# EAGLE board MotorControl (EAGLE 9.6.2)
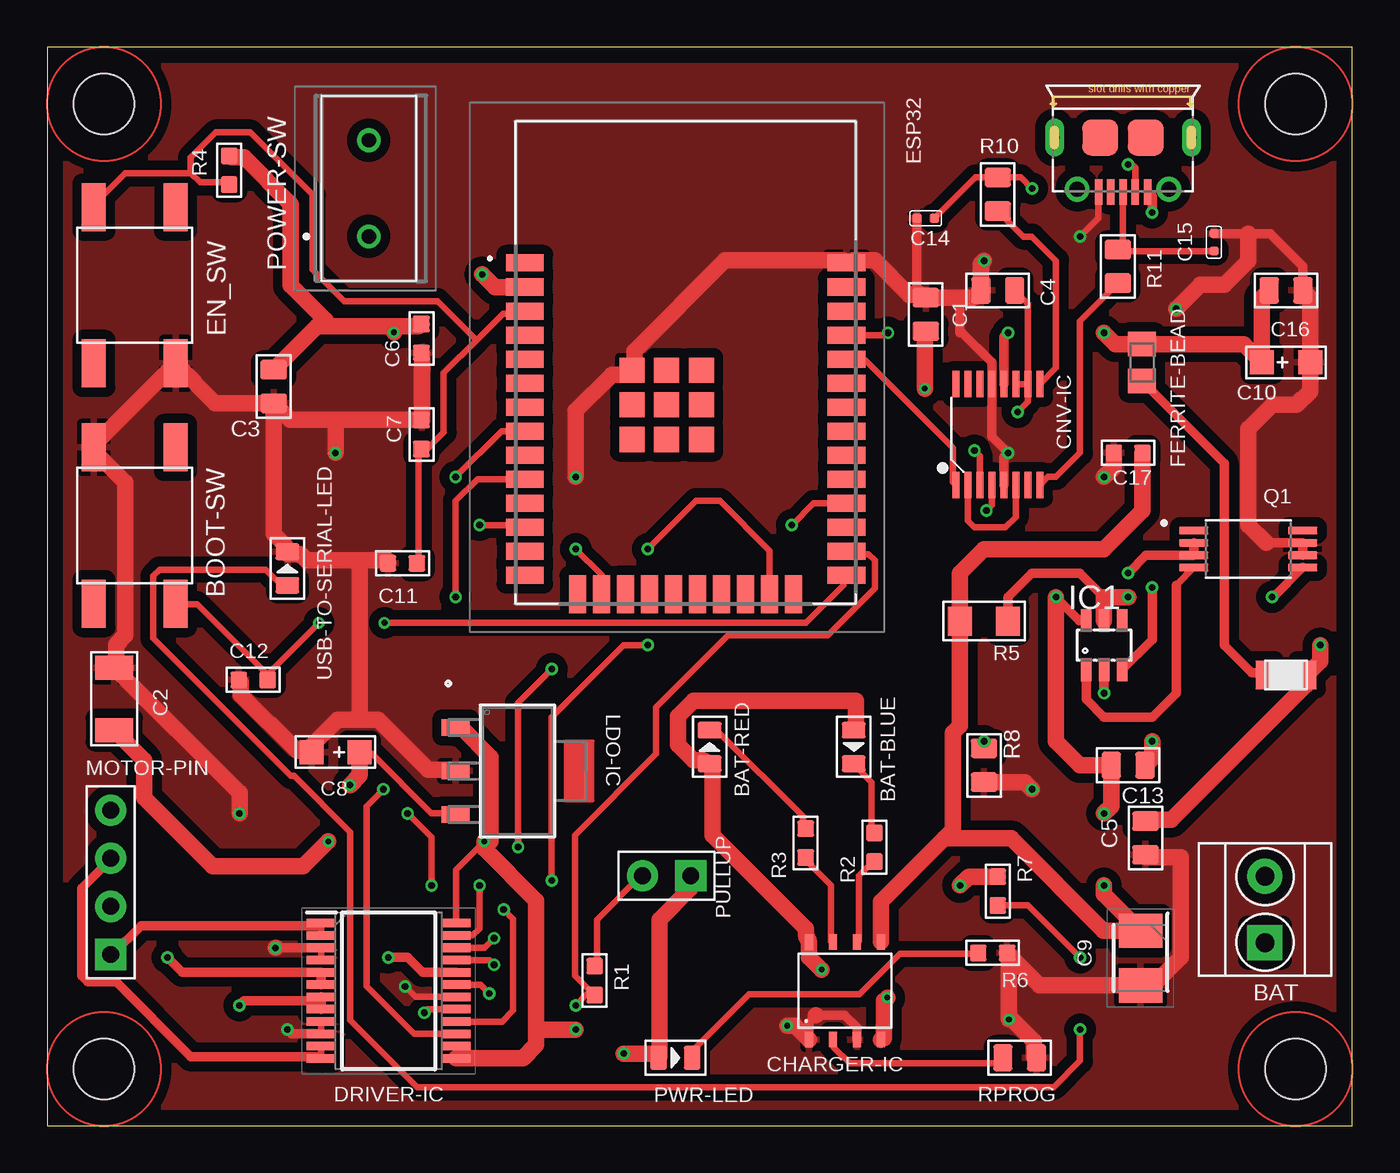
[diagram p0: board, top side]
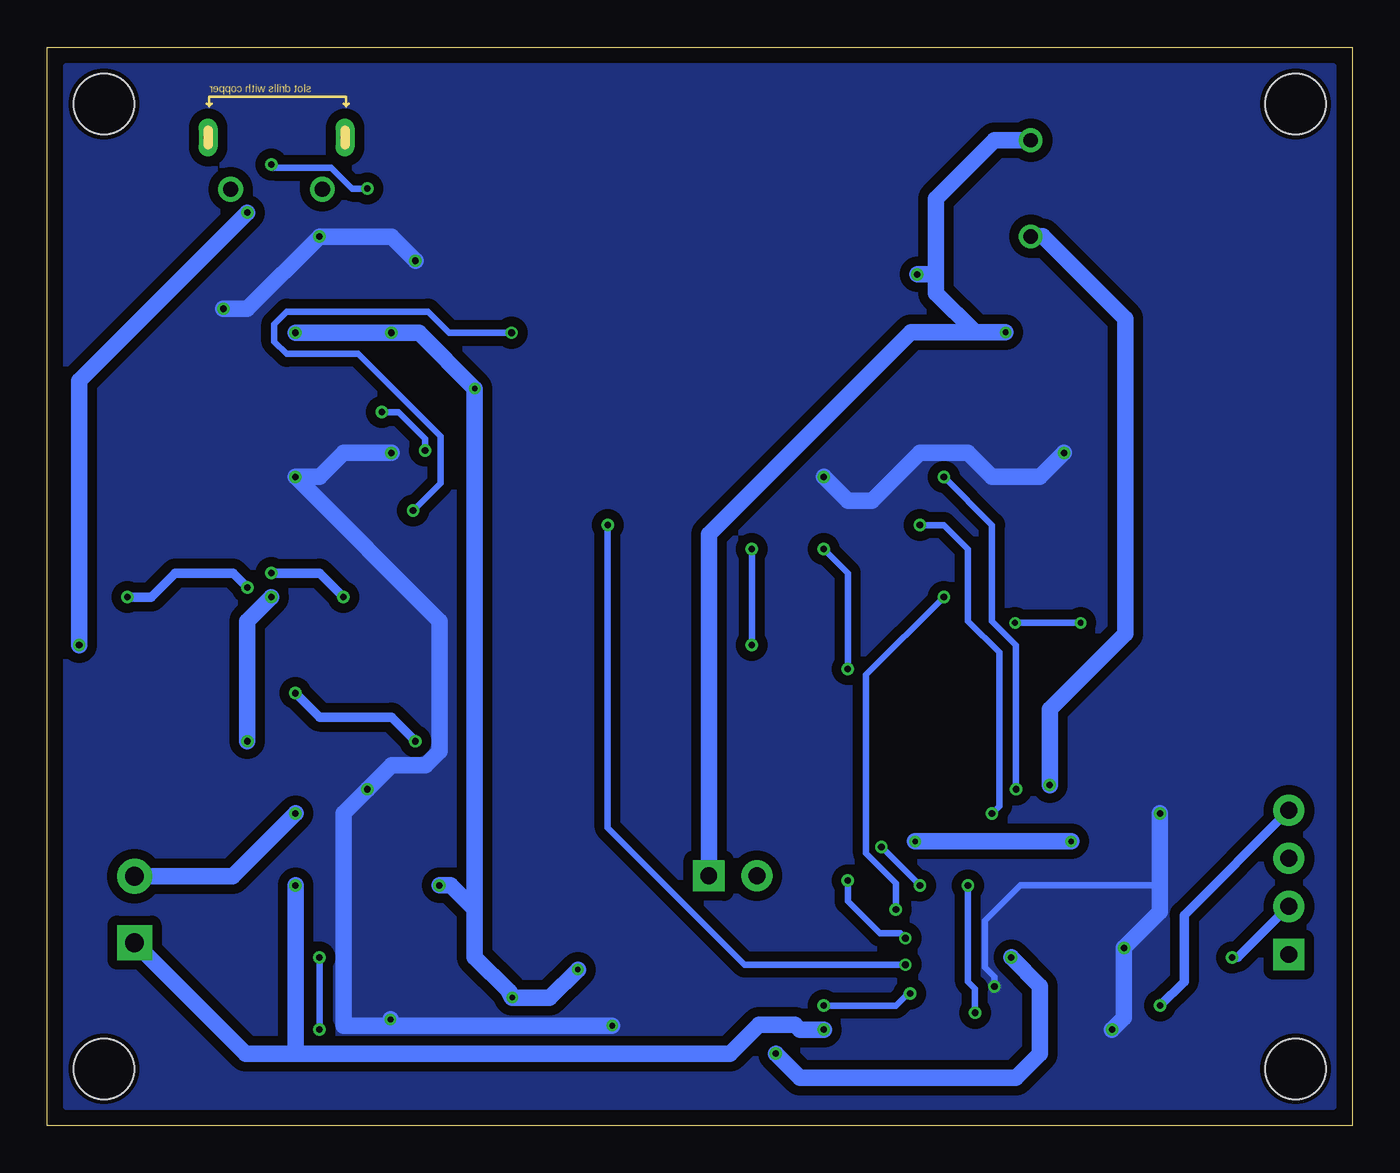
[diagram p1: board, bottom side, seen from below]

Size 69 x 57 mm. Coordinates in mm from the lower left corner, seen from the top.
Outline: 0,0 69,0 69,57 0,57 0,0
Copper layers (1*16): Top 0.035mm / dielectric 1.5mm / Bottom 0.035mm
Design rules "SeeedStudio_2layer_DRU_no_angle_20140221": minimum track width 6mil, minimum drill 12mil, track to track 6mil, track to pad 6mil, pad to pad 6mil, via to via 6mil, smd to smd 0mil, copper to edge 10mil, drill to drill 10mil, minimum pad ring 10mil, minimum via ring 6mil, stop-mask expansion 2mil, vias tented up to drill 100mil, thermal gap 10mil
Net classes: 0 default: width 0.356 mm, clearance 0.305 mm; 1 Power: width 0.864 mm, clearance 0.508 mm; 2 Motor: width 0.508 mm, clearance 0.356 mm
Holes 3.2 mm at 3,3 3,54 66,3 66,54

## Footprints (pad centres in the part's own frame; a part is rotated, then mirrored left to right if it is on the bottom)
H2-3.5-7.0X7.0MM = drill 1 pad 1.85 square: 1 -1.75,0 | drill 1 pad 1.85: 2 1.75,0
LED-0805 = smd 0.889 x 1.27: + -0.889,0; - 0.889,0
SW4-SMD-6.0X6.0X5.0MM = smd 2.54 x 1.27: 1 -4.129,2.159; 2 -4.129,-2.159; 3 4.129,-2.159; 4 4.129,2.159
C0805 = smd 1.397 x 1.016: 1 0,0.889; 2 0,-0.889
C1206 = smd 1.27 x 2.032: 1 -1.651,0; 2 1.651,0
C0603 = smd 0.889 x 0.889: 1 0,0.762; 2 0,-0.762
AVX-A = smd 1.27 x 1.27: + -1.27,0; - 1.27,0
CAPPM3528X210N = smd 1.8 x 2.3: 1 -1.45,0; 2 1.45,0
C0402 = smd 0.5 x 0.5: 1 0,0.463; 2 0,-0.463
SOT23-8 = smd 0.42 x 0.835: 1 -1.905,-2.58; 2 -0.635,-2.58; 3 0.635,-2.58; 4 1.905,-2.58; 5 1.905,2.58; 6 0.635,2.58; 7 -0.635,2.58; 8 -1.905,2.58
SSOP16-0.635-5X4MM = smd 0.381 x 1.397: 1 -2.223,-2.667; 2 -1.587,-2.667; 3 -0.953,-2.667; 4 -0.318,-2.667; 5 0.318,-2.667; 6 0.953,-2.667; 7 1.587,-2.667; 8 2.223,-2.667; 9 2.223,2.667; 10 1.587,2.667; 11 0.953,2.667; 12 0.318,2.667; 13 -0.318,2.667; 14 -0.953,2.667; 15 -1.587,2.667; 16 -2.223,2.667
SOP65P760X160-24N = smd 1.525 x 0.45: 1 -3.562,3.575; 2 -3.562,2.925; 3 -3.562,2.275; 4 -3.562,1.625; 5 -3.562,0.975; 6 -3.562,0.325; 7 -3.562,-0.325; 8 -3.562,-0.975; 9 -3.562,-1.625; 10 -3.562,-2.275; 11 -3.562,-2.925; 12 -3.562,-3.575; 13 3.562,-3.575; 14 3.562,-2.925; 15 3.562,-2.275; 16 3.562,-1.625; 17 3.562,-0.975; 18 3.562,-0.325; 19 3.562,0.325; 20 3.562,0.975; 21 3.562,1.625; 22 3.562,2.275; 23 3.562,2.925; 24 3.562,3.575
ESP32WROOM32E8MB = smd 2 x 0.9: 1 -8.5,5.26; 2 -8.5,3.99; 3 -8.5,2.72; 4 -8.5,1.45; 5 -8.5,0.18; 6 -8.5,-1.09; 7 -8.5,-2.36; 8 -8.5,-3.63; 9 -8.5,-4.9; 10 -8.5,-6.17; 11 -8.5,-7.44; 12 -8.5,-8.71; 13 -8.5,-9.98; 14 -8.5,-11.25; 25 8.5,-11.25; 26 8.5,-9.98; 27 8.5,-8.71; 28 8.5,-7.44; 29 8.5,-6.17; 30 8.5,-4.9; 31 8.5,-3.63; 32 8.5,-2.36; 33 8.5,-1.09; 34 8.5,0.18; 35 8.5,1.45; 36 8.5,2.72; 37 8.5,3.99; 38 8.5,5.26 | smd 0.9 x 2: 15 -5.715,-12.25; 16 -4.445,-12.25; 17 -3.175,-12.25; 18 -1.905,-12.25; 19 -0.635,-12.25; 20 0.635,-12.25; 21 1.905,-12.25; 22 3.175,-12.25; 23 4.445,-12.25; 24 5.715,-12.25 | smd 1.33 x 1.33: 39 -2.835,-0.405; 40 -1,-0.405; 41 0.835,-0.405; 42 -2.835,-2.24; 43 -1,-2.24; 44 0.835,-2.24; 45 -2.835,-4.075; 46 -1,-4.075; 47 0.835,-4.075
FB_LI0805H151R-10 = smd 1.285 x 1.47: 1 -0.973,0; 2 0.973,0
SMD0805R035SF = smd 1 x 1.5: 1 -1.1,0; 2 1.1,0
SOT23-6 = smd 0.55 x 1.2: 1 -0.95,-1.3; 2 0,-1.3; 3 0.95,-1.3; 4 0.95,1.3; 5 0,1.3; 6 -0.95,1.3
SOT-223-3_VAR-AA = smd 0.889 x 1.473: 1 -2.3,-3.264; 2 0,-3.264; 3 2.3,-3.264
H4-2.54 = drill 0.889 pad 1.651 square: 1 0,3.81 | drill 0.889 pad 1.651: 2 0,1.27; 3 0,-1.27; 4 0,-3.81
A11JP = drill 0.75 pad 1.2: 1 0,0; 3 0,-5.08
H2-2.54 = drill 0.889 pad 1.651 square: 1 0,1.27 | drill 0.889 pad 1.651: 2 0,-1.27
SOP65P640X120-8N = smd 1.56 x 0.4: 1 -2.88,0.975; 2 -2.88,0.325; 3 -2.88,-0.325; 4 -2.88,-0.975; 5 2.88,-0.975; 6 2.88,-0.325; 7 2.88,0.325; 8 2.88,0.975
R0603 = smd 0.889 x 0.889: 1 0,0.762; 2 0,-0.762
R1206 = smd 1.27 x 1.524: 1 -1.27,0; 2 1.27,0
R0805 = smd 1.397 x 1.016: 1 0,0.889; 2 0,-0.889
MICRO-USB5+6P-SMD-0.65-AB = smd 0.4 x 1.35: 1 -1.3,2.875; 2 -0.65,2.875; 3 0,2.875; 4 0.65,2.875; 5 1.3,2.875 | smd 1.9 x 1.9: P1 -1.2,0; P2 1.2,0 | drill 0.508 pad 1.016 long: P3 -3.625,0; P4 3.625,0 | drill 0.8: P5 -2.425,2.73; P6 2.425,2.73

## Placement (x,y rotation side)
BAT  GREEN-2P-3.5  [H2-3.5-7.0X7.0MM]  64.39,11.43 90 top
BAT-BLUE  CLEAR-BLUE-0805  [LED-0805]  42.64,20.02 270 top
BAT-RED  RED-0805  [LED-0805]  35.02,20.02 90 top
BOOT-SW  [SW4-SMD-6.0X6.0X5.0MM]  4.62,31.72 90 top
C1  100nf  [C0805]  46.45,42.88 0 top
C2  10uf  [C1206]  3.54,22.56 270 top
C3  22uf  [C0805]  11.97,39.07 180 top
C4  100nf  [C0805]  50.26,44.15 90 top
C5  10nf  [C0805]  58.07,15.21 0 top
C6  100nF/50V(10%)  [C0603]  19.78,41.61 180 top
C7  100nF/50V(10%)  [C0603]  19.78,36.53 0 top
C8  10uf  [AVX-A]  15.24,19.75 180 top
C9  6.8uF  [CAPPM3528X210N]  57.8,8.86 270 top
C10  4.7uf  [AVX-A]  65.5,40.34 0 top
C11  100nF/50V(10%)  [C0603]  18.78,29.72 90 top
C12  100nF/50V(10%)  [C0603]  10.89,23.56 90 top
C13  100nf  [C0805]  57.15,19.05 270 top
C14  47PF  [C0402]  46.45,47.96 270 top
C15  47PF  [C0402]  61.69,46.69 180 top
C16  100nf  [C0805]  65.5,44.15 270 top
C17  10UF 6.3V  [C0603]  57.15,35.56 270 top
CHARGER-IC  TP4056  [SOT23-8]  42.18,7.13 0 top
CNV-IC  INTERFACE-FT230XS-R(SSOP16)  [SSOP16-0.635-5X4MM]  50.26,36.53 0 top
DRIVER-IC  TB6612FNG  [SOP65P760X160-24N]  18.05,7.13 0 top
EN_SW  [SW4-SMD-6.0X6.0X5.0MM]  4.62,44.42 270 top
ESP32  ESP32-WROOM-32E8M  [ESP32WROOM32E8MB]  33.75,40.34 0 top
FERRITE-BEAD  LI0805H151R-10  [FB_LI0805H151R-10]  57.88,40.34 270 top
HUSE  SMD0805R035SF  [SMD0805R035SF]  65.5,23.83 0 top
IC1  DW01A  [SOT23-6]  55.88,25.4 0 top
LDO-IC  SPX3940AM3-L-3-3/TR  [SOT-223-3_VAR-AA]  24.86,18.75 270 top
MOTOR-PIN  4p-2.54  [H4-2.54]  3.35,12.86 180 top
POWER-SW  A11JP  [A11JP]  17,47 180 top
PULLUP  [H2-2.54]  32.75,13.21 270 top
PWR-LED  YELLOW-0805  [LED-0805]  33.21,3.59 0 top
Q1  FS8205A  [SOP65P640X120-8N]  63.5,30.48 0 top
R1  10K  [R0603]  28.94,7.67 180 top
R2  1K  [R0603]  43.73,14.72 0 top
R3  1K  [R0603]  40.1,14.94 0 top
R4  10K  [R0603]  9.62,50.5 180 top
R5  100R  [R1206]  49.53,26.67 180 top
R6  300R  [R0603]  49.99,9.13 90 top
R7  1K  [R0603]  50.26,12.4 180 top
R8  1K  [R0805]  49.53,19.05 0 top
R10  27R  [R0805]  50.26,49.23 0 top
R11  27R  [R0805]  56.61,45.42 0 top
RPROG  1.2K  [R0805]  51.42,3.59 270 top
USB1  ZX62-B-5PA  [MICRO-USB5+6P-SMD-0.65-AB]  56.88,52.23 180 top
USB-TO-SERIAL-LED  GREEN-0805  [LED-0805]  12.7,29.45 90 top

## Library data of the parts
BAT = OPL_Connector; MPN: GS012S-3.5-02P-11
BAT-BLUE = OPL_Optoelectronics; MPN: EL-17-215/BHC-AN1P2/3T
BAT-RED = OPL_Optoelectronics; MPN: 17-215SURC/S530-A2/TR8
BOOT-SW EN_SW = OPL_Switch; MPN: DTSM-62K-S-V-T/R(SN431)
C1 C4 C13 C16 = OPL_Capacitor; MPN: CC0805KRX7R9BB104
C2 = OPL_Capacitor; MPN: CC1206KKX5R8BB106
C3 = OPL_Capacitor; MPN: CC0805MKX5R5BB226
C5 = OPL_Capacitor; MPN: CC0805JRX7R9BB103
C6 C7 C11 C12 = OPL_Capacitor; MPN: CC0603KRX7R9BB104
C8 = OPL_Capacitor; MPN: TAJA106K016RNJ
C9 = TCJB685M025R0150; MPN: TCJB685M025R0150
C10 = OPL_Capacitor; MPN: TAJA475*016#NJ
C14 C15 = OPL_Capacitor; MPN: CC0402JRNPO9BN470
C17 = OPL_Capacitor; MPN: CC0603MRX5R5BB106
CHARGER-IC = TP4056; MPN: TP4056
CNV-IC = INTERFACE-FT230XS-R_SSOP16_; AVAILABILITY: In Stock; DESCRIPTION: USB Bridge, USB to UART USB 2.0 UART Interface 16-SSOP; MF: FTDI,; MP: FT230XS-R; PACKAGE: SSOP-16 FTDI; PRICE: None; PURCHASE-URL: https://pricing.snapeda.com/search/part/FT230XS-R/?ref=eda
DRIVER-IC = TB6612FNG; DESCRIPTION: Brush motor driver IC; HEIGHT: 1.6mm; MANUFACTURER_NAME: Toshiba; MANUFACTURER_PART_NUMBER: TB6612FNG
ESP32 = ESP32-WROOM-32; DESCRIPTION: WiFi Modules (802.11) Mod 8 MB SPI flash PCB antenna; HEIGHT: 3.2mm; MANUFACTURER_NAME: Espressif Systems; MANUFACTURER_PART_NUMBER: ESP32-WROOM-32E (8MB); MOUSER_PART_NUMBER: 356-ESP32WRM32E164PH; MOUSER_PRICE-STOCK: https://www.mouser.co.uk/ProductDetail/Espressif-Systems/ESP32-WROOM-32E-8MB?qs=GBLSl2AkirsjshqvD9slKA%3D%3D
FERRITE-BEAD = LI0805H151R-10; AVAILABILITY: In Stock; DESCRIPTION: 150 Ohms @ 100MHz 1 Power, Signal Line Ferrite Bead 0805 (2012 Metric) 800mA 150mOhm; MF: Laird-Signal Integrity; MP: LI0805H151R-10; PACKAGE: 0805 Laird; PRICE: None; PURCHASE-URL: https://pricing.snapeda.com/search/part/LI0805H151R-10/?ref=eda
HUSE = SMD0805R035SF; MPN: SMD0805R035SF
IC1 = DW01A; AVAILABILITY: No availability data; DESCRIPTION: One Cell Lithium-ion/Polymer Battery Protection IC; MF: Fortune Semiconductor; MP: DW01A; PACKAGE: SOT-23-6 Fortune Semiconductor; PRICE: None
LDO-IC = SPX3940AM3-L-3-3:TR; BUILT_BY: EMA_Jessica; COPYRIGHT: Copyright (C) 2018 Accelerated Designs. All rights reserved; MANUFACTURER_PART_NUMBER: SPX3940AM3-L-3-3/TR; SOURCELIBRARY: Exar_2019-09-16; VENDOR: Exar
MOTOR-PIN = OPL_Connector; MPN: F185-1104A1BSYA1
POWER-SW = A11JP; ARROW_PART_NUMBER: A11JP; ARROW_PRICE-STOCK: https://www.arrow.com/en/products/a11jp/nkk-switches; DESCRIPTION: NKK SWITCHES - A11JP - SWITCH, TOGGLE, SPST, 0.1A, 28VAC; HEIGHT: 19.4mm; MANUFACTURER_NAME: NKK Switches; MANUFACTURER_PART_NUMBER: A11JP; MOUSER_PART_NUMBER: 633-A11JP; MOUSER_PRICE-STOCK: https://www.mouser.co.uk/ProductDetail/NKK-Switches/A11JP?qs=KqcCwYXy5KGYGAOWVYZnow%3D%3D
PULLUP = OPL_Connector
PWR-LED = OPL_Optoelectronics; MPN: 17-215UYC/S530-A3/TR8
Q1 = FS8205A; AVAILABILITY: No availability data; MF: Fortune Semiconductor; MP: FS8205A; PACKAGE: Package; PRICE: None
R1 R4 = OPL_Resistor; MPN: RC0603FR-0710KL
R2 R3 R7 = OPL_Resistor; MPN: RC0603FR-071KL
R5 = OPL_Resistor; MPN: RC1206JR-07100RL
R6 = OPL_Resistor; MPN: RC0603FR-071K5L
R8 R10 R11 RPROG = OPL_Resistor; MPN: RC0805JR-071KL
USB1 = OPL_Connector; MPN: ZX62-B-5PA
USB-TO-SERIAL-LED = OPL_Optoelectronics; MPN: 17-215SYGC/S530-E2/TR8

## Nets
+3V3 [Power]: C3.2 C6.2 DRIVER-IC.20 ESP32.2 POWER-SW.3 PULLUP.1 PWR-LED.+ R4.2
AIN1: DRIVER-IC.21 ESP32.28
AIN2: DRIVER-IC.22 ESP32.23
AO1 [Motor]: DRIVER-IC.1 DRIVER-IC.2 MOTOR-PIN.1
AO2 [Motor]: DRIVER-IC.5 DRIVER-IC.6 MOTOR-PIN.2
B+ [Power]: BAT.1 C2.2 C9.1 C17.1 CHARGER-IC.5 DRIVER-IC.13 DRIVER-IC.14 DRIVER-IC.24 LDO-IC.1 R5.2
B- [Power]: BAT.2 C13.2 IC1.6 Q1.2 Q1.3
BIN1: DRIVER-IC.17 ESP32.12
BIN2: DRIVER-IC.16 ESP32.10
BO1 [Motor]: DRIVER-IC.11 DRIVER-IC.12 MOTOR-PIN.3
BO2 [Motor]: DRIVER-IC.7 DRIVER-IC.8 MOTOR-PIN.4
GND [Power]: BOOT-SW.4 C1.1 C2.1 C3.1 C4.1 C5.2 C6.1 C7.1 C8.- C9.2 C10.- C11.1 C12.1 C14.2 C15.2 C16.1 C17.2 CHARGER-IC.1 CHARGER-IC.3 CNV-IC.5 CNV-IC.13 DRIVER-IC.3 DRIVER-IC.4 DRIVER-IC.9 DRIVER-IC.10 DRIVER-IC.18 EN_SW.4 ESP32.38 ESP32.39 LDO-IC.2 Q1.6 Q1.7 R6.2 R8.2 RPROG.1 USB1.5 USB-TO-SERIAL-LED.-
N$1: IC1.3 Q1.5
N$2: BAT-RED.- R3.1
N$3: R7.1 USB-TO-SERIAL-LED.+
N$4: FERRITE-BEAD.2 HUSE.1
N$5: C4.2 CNV-IC.3 CNV-IC.10 CNV-IC.11
N$6: CNV-IC.2 CNV-IC.6
N$7: CNV-IC.9 R10.2
N$8: CNV-IC.8 R11.2
N$9: C14.1 R10.1 USB1.2
N$10: IC1.1 Q1.4
N$11: CHARGER-IC.7 R3.2
N$12: CHARGER-IC.6 R2.2
N$13: BAT-BLUE.- R2.1
N$14: PWR-LED.- R6.1
N$15: C15.1 R11.1 USB1.3
N$16: CHARGER-IC.2 RPROG.2
N$18: C13.1 IC1.5 R5.1
N$19: IC1.2 R8.1
N$25: PULLUP.2 R1.2
N$29: C7.2 C11.2 EN_SW.2 ESP32.3 R4.1
N$30: BOOT-SW.2 C12.2 ESP32.25
POWER_SW: C8.+ LDO-IC.3 POWER-SW.1
PWMA: DRIVER-IC.23 ESP32.16
PWMB: DRIVER-IC.15 ESP32.8
RXD: CNV-IC.4 ESP32.35
STBY: DRIVER-IC.19 ESP32.26 R1.1
TXD: CNV-IC.1 ESP32.34
VBUS [Power]: C5.1 HUSE.2 USB1.1
VIN+ [Power]: BAT-BLUE.+ BAT-RED.+ C1.2 C10.+ C16.2 CHARGER-IC.4 CHARGER-IC.8 CNV-IC.12 FERRITE-BEAD.1 R7.2

## Tracks (layer width: path | path; a pad name or v marks a point on that pad's centre or on a via)
+3V3  (via drill 0.3, 0.35)
  Top 0.356: 32.1,3.81 PWR-LED.+
  Top 0.508: DRIVER-IC.20 19.84,8.11 19.05,8.89 v18.03,8.89
  Top 0.864: PWR-LED.+ 32.36,3.63 32.36,10.9 34.01,12.55 PULLUP.1 | 14.86,42.27 18.33,42.27 | 18.33,42.27 19.65,42.27 C6.2 | R4.2 9.74,51.18 10.4,51.18 12.88,48.7 12.88,44.41 14.69,42.6 14.86,42.27 | v18.33,41.94 18.33,42.27 | ESP32.2 23.67,44.33 v23,45 | v30.48,3.81 32.1,3.81 | C3.2 14.28,42.27 14.86,42.27
  Bottom 0.864: PULLUP.1 34.01,13.37 34.01,31.25 23.33,41.94 v18.33,41.94 19.93,41.94 22,44 22,45 | 22,45 22,49 18.92,52.08 POWER-SW.3 | v23,45 22,45 | v30.48,3.81 29.21,2.54 17.78,2.54 16.51,3.81 16.51,7.37 v18.03,8.89
AIN1  (via drill 0.35)
  Top 0.356: ESP32.28 40.52,32.9 v39.37,31.75 | DRIVER-IC.21 23.38,8.76 v23.62,8.51
  Bottom 0.356: v39.37,31.75 39.37,15.75 32.13,8.51 v23.62,8.51
AIN2  (via drill 0.35)
  Top 0.356: v26.67,12.95 26.67,21.59 30.48,25.4 v31.75,25.4 | v31.75,30.48 34.29,33.02 35.56,33.02 38.2,30.39 ESP32.23 | DRIVER-IC.22 23.12,9.4 v23.62,9.91
  Bottom 0.356: v31.75,25.4 v31.75,30.48 | v23.62,9.91 23.88,10.16 24.97,10.16 26.67,11.86 v26.67,12.95
AO1
  Top 0.356: DRIVER-IC.2 DRIVER-IC.1
  Top 0.508: DRIVER-IC.1 14.36,10.57 4.95,10.57 3.47,9.08 MOTOR-PIN.1
AO2  (via drill 0.35)
  Top 0.508: DRIVER-IC.6 DRIVER-IC.5 7.13,8.11 v6.35,8.89
  Bottom 0.508: v6.35,8.89 6.05,8.89 MOTOR-PIN.2
B+  (via drill 0.3, 0.35)
  Top 0.356: DRIVER-IC.24 21.61,13.52 v23.11,15.02 | DRIVER-IC.14 DRIVER-IC.13
  Top 0.864: 47.43,15.19 44.08,11.84 44.09,11.83 CHARGER-IC.5 | 47.43,15.19 50.97,15.19 55.84,10.31 C9.1 55.88,12.23 v55.88,12.7 | C2.2 3.63,20.8 5.12,19.32 5.12,17.34 8.75,13.7 13.54,13.7 v14.86,15.02 | LDO-IC.1 21.63,20.97 21.96,20.97 23.44,19.48 23.44,15.02 v23.11,15.02 23.11,14.64 25.86,11.9 25.86,5.08 | v27.94,5.08 25.86,5.08 | C17.1 57.91,32.51 55.88,30.48 49.53,30.48 48.26,29.21 R5.2 48.26,21.13 47.89,20.76 47.89,15.65 47.43,15.19 | 25.86,5.08 25.86,4.27 25.14,3.56 DRIVER-IC.13
  Bottom 0.864: v23.11,15.02 v14.86,15.02 | v27.94,5.08 29.21,5.08 29.46,5.33 31.37,5.33 32.91,3.8 55.88,3.8 | v55.88,12.7 55.88,3.8 | BAT.1 58.51,3.8 55.88,3.8
B-  (via drill 0.35)
  Top 0.508: Q1.2 Q1.3 58.09,30.16 v57.15,29.21 | IC1.6 54.58,26.7 v53.34,27.94
  Top 0.864: v53.34,27.94 53.34,20.32 54.61,19.05 C13.2 56.26,16.89 v55.88,16.51
  Bottom 0.508: v53.34,27.94 54.61,29.21 v57.15,29.21
  Bottom 0.864: BAT.2 59.21,13.18 v55.88,16.51
BIN1  (via drill 0.35)
  Top 0.356: v20.32,12.7 20.32,15.24 v19.05,16.51 | ESP32.12 25.13,31.75 v22.86,31.75 | DRIVER-IC.17 20.12,6.16 v19.94,5.97
  Bottom 0.356: v19.05,16.51 18.67,16.89 18.67,25.02 20.32,26.67 20.32,30.48 21.59,31.75 v22.86,31.75 | v19.94,5.97 19.94,7.24 20.32,7.62 v20.32,12.7
BIN2  (via drill 0.35)
  Top 0.356: DRIVER-IC.16 24.05,5.5 24.64,6.1 24.64,10.92 v24.13,11.43 | ESP32.10 22.74,34.17 21.59,33.02 v21.59,27.94
  Bottom 0.356: v24.13,11.43 24.13,12.82 25.7,14.4 25.7,23.83 v21.59,27.94
BO1
  Top 0.356: DRIVER-IC.11 DRIVER-IC.12
  Top 0.508: DRIVER-IC.12 14.36,3.63 7.59,3.63 3.63,7.59 2.15,7.59 1.82,7.92 1.82,12.55 3.3,14.03 MOTOR-PIN.3
BO2  (via drill 0.35)
  Top 0.508: DRIVER-IC.7 14.49,6.59 | 14.49,6.59 DRIVER-IC.8 | v10.16,6.35 10.4,6.59 14.49,6.59
  Bottom 0.508: MOTOR-PIN.4 8.89,11.13 8.89,7.62 v10.16,6.35
GND  (via drill 0.3, 0.35)
  Top 0.356: USB1.5 55.58,47.96 v54.61,46.99 | DRIVER-IC.3 DRIVER-IC.4 | DRIVER-IC.9 DRIVER-IC.10 | DRIVER-IC.18 19.48,6.8 v18.92,7.37
  Top 0.508: 64.44,30.8 Q1.7 Q1.6 | 48.26,43.77 48.26,41.91 48.37,41.91 49.94,40.34 CNV-IC.13 49.94,36.42 v50.8,35.56 50.58,35.34 CNV-IC.5 | C16.1 66.39,45.42 64.66,47.15 63.5,47.15 C15.2 | DRIVER-IC.3 12.07,9.4 | DRIVER-IC.10 12.93,4.86 v12.7,5.08 | CHARGER-IC.1 40.27,5.46 40.64,5.83 | CHARGER-IC.3 42.81,5.19 42.16,5.84 40.65,5.84 | C14.2 45.99,44.32 46.56,43.75
  Top 0.864: C12.1 10.24,23.44 10.24,22.78 13.21,19.81 13.87,19.81 C8.- 14.03,20.14 15.35,21.46 16.51,21.46 | 16.51,21.46 17.5,21.46 20.14,18.82 21.46,18.82 LDO-IC.2 | C6.1 19.81,40.78 19.81,37.31 C7.1 19.48,37.31 15.24,37.31 | 16.51,29.88 13.7,29.88 13.37,30.21 12.71,30.21 USB-TO-SERIAL-LED.- 12.55,30.71 11.97,31.29 C3.1 | 16.51,29.88 18,29.88 C11.1 | 16.51,29.88 16.51,21.46 | 50.85,5.78 50.85,9.08 R6.2 52.45,7.43 57.95,7.43 | 50.85,5.78 52.17,4.46 52.17,3.63 RPROG.1 | C5.2 58.12,14.2 59.93,14.2 59.93,8.91 58.45,7.43 57.95,7.43 | 57.95,7.43 C9.2 | v50.85,5.61 50.85,5.78 | 46.56,43.75 C1.1 | C1.1 46.06,43.92 45.57,43.92 43.75,45.73 42.6,45.73 ESP32.38 42.1,45.73 35.83,45.73 31.04,40.95 31.04,39.95 ESP32.39 30.68,39.7 29.86,39.7 27.94,37.78 v27.94,34.29 | R8.2 51.69,18.16 v52.07,17.78 | 64.44,30.8 63.5,31.75 63.5,36.83 64.77,38.1 66.04,38.1 66.77,38.83 C10.- 66.77,43.77 C16.1 | C1.1 48.26,43.77 48.99,43.77 C4.1 49.37,45.56 v49.53,45.72 | v59.69,43.18 60.96,44.45 62.23,44.45 63.5,45.72 63.5,47.15 | v55.88,34.29 56.39,34.8 C17.2 | 15.24,37.31 v15.24,35.56 | v10.16,16.51 10.16,17.59 C2.1 3.63,24.11 3.63,25.43 4.13,25.92 4.13,34.01 2.64,35.5 BOOT-SW.4 2.48,35.99 EN_SW.4 8.89,38.18 C3.1 | 12.07,9.4 v12.06,9.4 | 40.65,5.84 40.64,5.83 | CHARGER-IC.1 39.54,5.28 v39.13,5.28 | C3.1 12.84,37.31 15.24,37.31
  Bottom 0.356: 10.16,12.7 17.55,12.7 19.43,10.82 19.43,8.38 18.92,7.87 v18.92,7.37
  Bottom 0.864: 50.85,5.28 53.34,5.28 53.34,16.51 v52.07,17.78 50.8,19.05 49.01,19.05 48.26,19.8 48.26,26.67 v55.88,34.29 54.61,34.29 53.34,35.56 v50.8,35.56 | 50.85,5.28 v39.13,5.28 | v50.85,5.61 50.85,5.28 | v49.53,45.72 50.8,46.99 v54.61,46.99 58.42,43.18 v59.69,43.18 | v15.24,35.56 16.51,34.29 19.05,34.29 20.32,35.56 22.86,35.56 25.4,33.02 26.67,33.02 v27.94,34.29 | v10.16,16.51 10.16,12.7 10.16,11.3 v12.06,9.4 12.06,5.71 v12.7,5.08
  pour Bottom: 1,56 1,1 68,1 68,56
  pour Top: 1,56 1,1 68,1 68,56
N$1  (via drill 0.35)
  Top 0.508: IC1.3 58.42,25.69 v58.42,28.45 | Q1.5 64.81,27.94 v64.77,27.94
  Bottom 0.508: v58.42,28.45 59.18,29.21 62.23,29.21 63.5,27.94 v64.77,27.94
N$2
  Top 0.356: R3.1 39.95,15.85 39.95,16.34 35.5,20.8 35.17,20.8 BAT-RED.-
N$3  (via drill 0.35)
  Top 0.356: USB-TO-SERIAL-LED.+ 12.55,28.4 11.56,29.39 5.94,29.39 5.61,29.06 5.61,25.76 12.88,18.49 13.04,18.49 16.02,15.52 16.02,5.58 19.56,2.03 53.21,2.03 54.61,3.43 v54.61,5.08 | R7.1 51.86,11.64 v54.61,8.89
  Bottom 0.356: v54.61,8.89 v54.61,5.08
N$4
  Top 0.356: 64.39,23.94 HUSE.1
  Top 0.508: FERRITE-BEAD.2 62.23,35.02 62.23,25.4 63.69,23.94 64.39,23.94
N$5  (via drill 0.35)
  Top 0.356: CNV-IC.10 51.85,43.45 C4.2 | CNV-IC.10 CNV-IC.11 | CNV-IC.3 49.31,35.4 v49.02,35.69 | CNV-IC.10 51.85,38.26 v51.31,37.72
  Bottom 0.356: v49.02,35.69 49.02,36.32 50.42,37.72 v51.31,37.72
N$6
  Top 0.356: CNV-IC.2 48.67,31.97 49.02,31.62 50.67,31.62 51.21,32.16 CNV-IC.6
N$7
  Top 0.356: R10.2 51.61,46.99 52.07,46.99 53.34,45.72 53.34,40.05 CNV-IC.9
N$8
  Top 0.356: R11.2 54.61,42.53 54.61,35.56 53.34,34.29 52.91,34.29 CNV-IC.8
N$9  (via drill 0.35)
  Top 0.356: USB1.2 57.53,50.62 57.35,50.8 v57.15,50.8 | C14.1 49.07,50.12 R10.1 51.48,50.12 v52.07,49.53
  Bottom 0.356: v52.07,49.53 52.88,49.53 53.98,50.64 56.99,50.64 v57.15,50.8
N$10
  Top 0.381: Q1.4 59.69,28.57
  Top 0.508: IC1.1 54.93,22.54 55.88,21.59 58.42,21.59 59.69,22.86 59.69,28.57
N$11
  Top 0.356: CHARGER-IC.7 41.44,9.74 41.44,12.71 40.12,14.03 R3.2
N$12
  Top 0.356: CHARGER-IC.6 42.93,9.74 42.93,13.21 43.59,13.87 R2.2
N$13
  Top 0.356: R2.1 43.59,15.52 43.59,18.16 42.76,18.99 BAT-BLUE.-
N$14
  Top 0.356: PWR-LED.- 34.1,3.94 37.11,6.95 42.94,6.95 45.07,9.08 49.2,9.08 R6.1
N$15
  Top 0.356: USB1.3 56.88,46.58 R11.1 | C15.1 56.69,46.23
  Top 0.864: 56.69,46.23 R11.1
N$16
  Top 0.356: CHARGER-IC.2 41.6,4.46 41.6,4.13 42.43,3.3 50.35,3.3 50.52,3.47 RPROG.2
N$18  (via drill 0.35)
  Top 0.508: R5.1 50.8,27.94 52.07,29.21 54.61,29.21 55.88,27.94
  Top 0.864: IC1.5 55.88,27.94 v57.15,27.94 | C13.1 58.42,19.43 v58.42,20.32
  Bottom 0.864: v57.15,27.94 58.42,26.67 v58.42,20.32
N$19  (via drill 0.35)
  Top 0.508: R8.1 v49.53,20.32 | IC1.2 v55.88,22.86
  Bottom 0.508: v55.88,22.86 54.61,21.59 50.8,21.59 v49.53,20.32
N$25
  Top 0.356: R1.2 29.06,8.59 29.06,10.9 31.37,13.21 PULLUP.2
N$29
  Top 0.356: 7.59,50.35 8.09,49.86 9.58,49.86 R4.1 | 7.59,50.35 4.13,50.35 2.48,48.7 EN_SW.2 | C11.2 19.65,29.88 19.65,35.66 C7.2 19.81,35.5 20.97,36.65 20.97,39.79 22.7,41.52 | 22.7,41.52 24.11,42.93 25.09,42.93 ESP32.3 | 7.59,50.35 7.59,51.18 8.91,52.5 10.73,52.5 14.03,49.2 14.03,45.24 15.68,43.59 20.64,43.59 22.7,41.52
N$30  (via drill 0.3)
  Top 0.356: BOOT-SW.2 6.93,27.57 7.92,27.57 11.56,23.94 11.56,23.61 C12.2 11.72,23.94 v14.36,26.58 | v17.83,26.58 40.12,26.58 42.1,28.56 42.1,29.06 ESP32.25
  Bottom 0.356: v14.36,26.58 v17.83,26.58
POWER_SW  (via drill 0.35)
  Top 0.356: C8.+ 16.51,19.65 17.17,19.65 20.31,16.51 21.46,16.51 LDO-IC.3
  Top 0.864: C8.+ 16.51,18.51 v16,18
  Bottom 0.864: v16,18 16,22 12,26 12,42.64 16.36,47 POWER-SW.1
PWMA  (via drill 0.35)
  Top 0.356: v24.89,14.73 24.89,22.35 v26.67,24.13 | v27.94,30.48 29.3,29.11 ESP32.16 | DRIVER-IC.23 22.5,10.05 22.86,10.41 v22.86,12.7
  Bottom 0.356: v26.67,24.13 26.67,29.21 v27.94,30.48 | v22.86,12.7 v24.89,14.73
PWMB  (via drill 0.35)
  Top 0.356: DRIVER-IC.15 19.4,4.86 16.89,7.37 16.89,16.89 v17.78,17.78 | v21.59,34.29 24.01,36.71 ESP32.8
  Bottom 0.356: v17.78,17.78 17.78,25.4 19.05,26.67 19.05,31.75 v21.59,34.29
RXD  (via drill 0.35)
  Top 0.356: CNV-IC.4 49.94,32.8 v49.66,32.51 | v44.45,41.91 44.33,41.79 ESP32.35
  Bottom 0.356: v49.66,32.51 48.21,33.96 48.21,36.45 52.56,40.79 56.34,40.79 57,41.45 57,42.37 56.34,43.03 48.88,43.03 47.76,41.91 v44.45,41.91
STBY  (via drill 0.35)
  Top 0.356: ESP32.26 42.27,30.21 43.42,30.21 43.75,29.88 43.75,28.4 41.27,25.92 35.99,25.92 32.19,22.12 32.19,19.65 27.9,15.35 27.9,7.92 28.89,6.93 R1.1 28.5,6.91 v27.94,6.35 | DRIVER-IC.19 22.9,7.46 v23.37,6.99
  Bottom 0.356: 23.5,6.99 24.13,6.35 v27.94,6.35
  Bottom 0.508: v23.37,6.99 23.5,6.99
TXD
  Top 0.356: CNV-IC.1 47.88,34.01 47.88,35.83 43.26,40.45 42.27,40.45 ESP32.34
VBUS  (via drill 0.35)
  Top 0.508: USB1.1 58.42,49.12 v58.42,48.26
  Top 0.864: C5.1 58.12,16.18 59.44,16.18 66.53,23.28 66.53,23.77 HUSE.2 67.31,24.54 v67.31,25.4
  Bottom 0.864: v58.42,48.26 67.31,39.37 v67.31,25.4
VIN+  (via drill 0.3, 0.35)
  Top 0.508: CNV-IC.12 50.58,41.69 v50.8,41.91
  Top 0.864: BAT-BLUE.+ 42.76,20.97 42.76,22.45 34.18,22.45 33.35,21.63 33.35,20.14 34.18,19.32 34.67,19.32 BAT-RED.+ 35.17,18.99 35.17,15.35 40.12,10.4 40.12,10.07 CHARGER-IC.8 40.28,9.58 40.28,8.91 v40.95,8.26 | v44.41,6.77 44.25,6.6 44.25,4.62 CHARGER-IC.4 | v46.39,38.96 46.39,41.94 C1.2 | v48.26,12.7 48.72,13.16 R7.2 | C16.2 64.23,43.77 C10.+ 63.26,41.31 FERRITE-BEAD.1 56.48,41.31 v55.88,41.91
  Bottom 0.864: v40.95,8.26 42.43,6.77 v44.41,6.77 44.58,7.1 46.39,8.91 46.39,11.43 | 46.39,11.43 v46.39,38.96 49.34,41.91 v50.8,41.91 v55.88,41.91 | 46.39,11.43 47.66,12.7 v48.26,12.7
(copper drawn outside any net)
  shapes: Top circle x4

## Text on the board
tValues: BO2 | - | BO1 | AO2 | AO1 | +